# EAGLE board HV rev1 (EAGLE 8.4.1), part 1 of 2
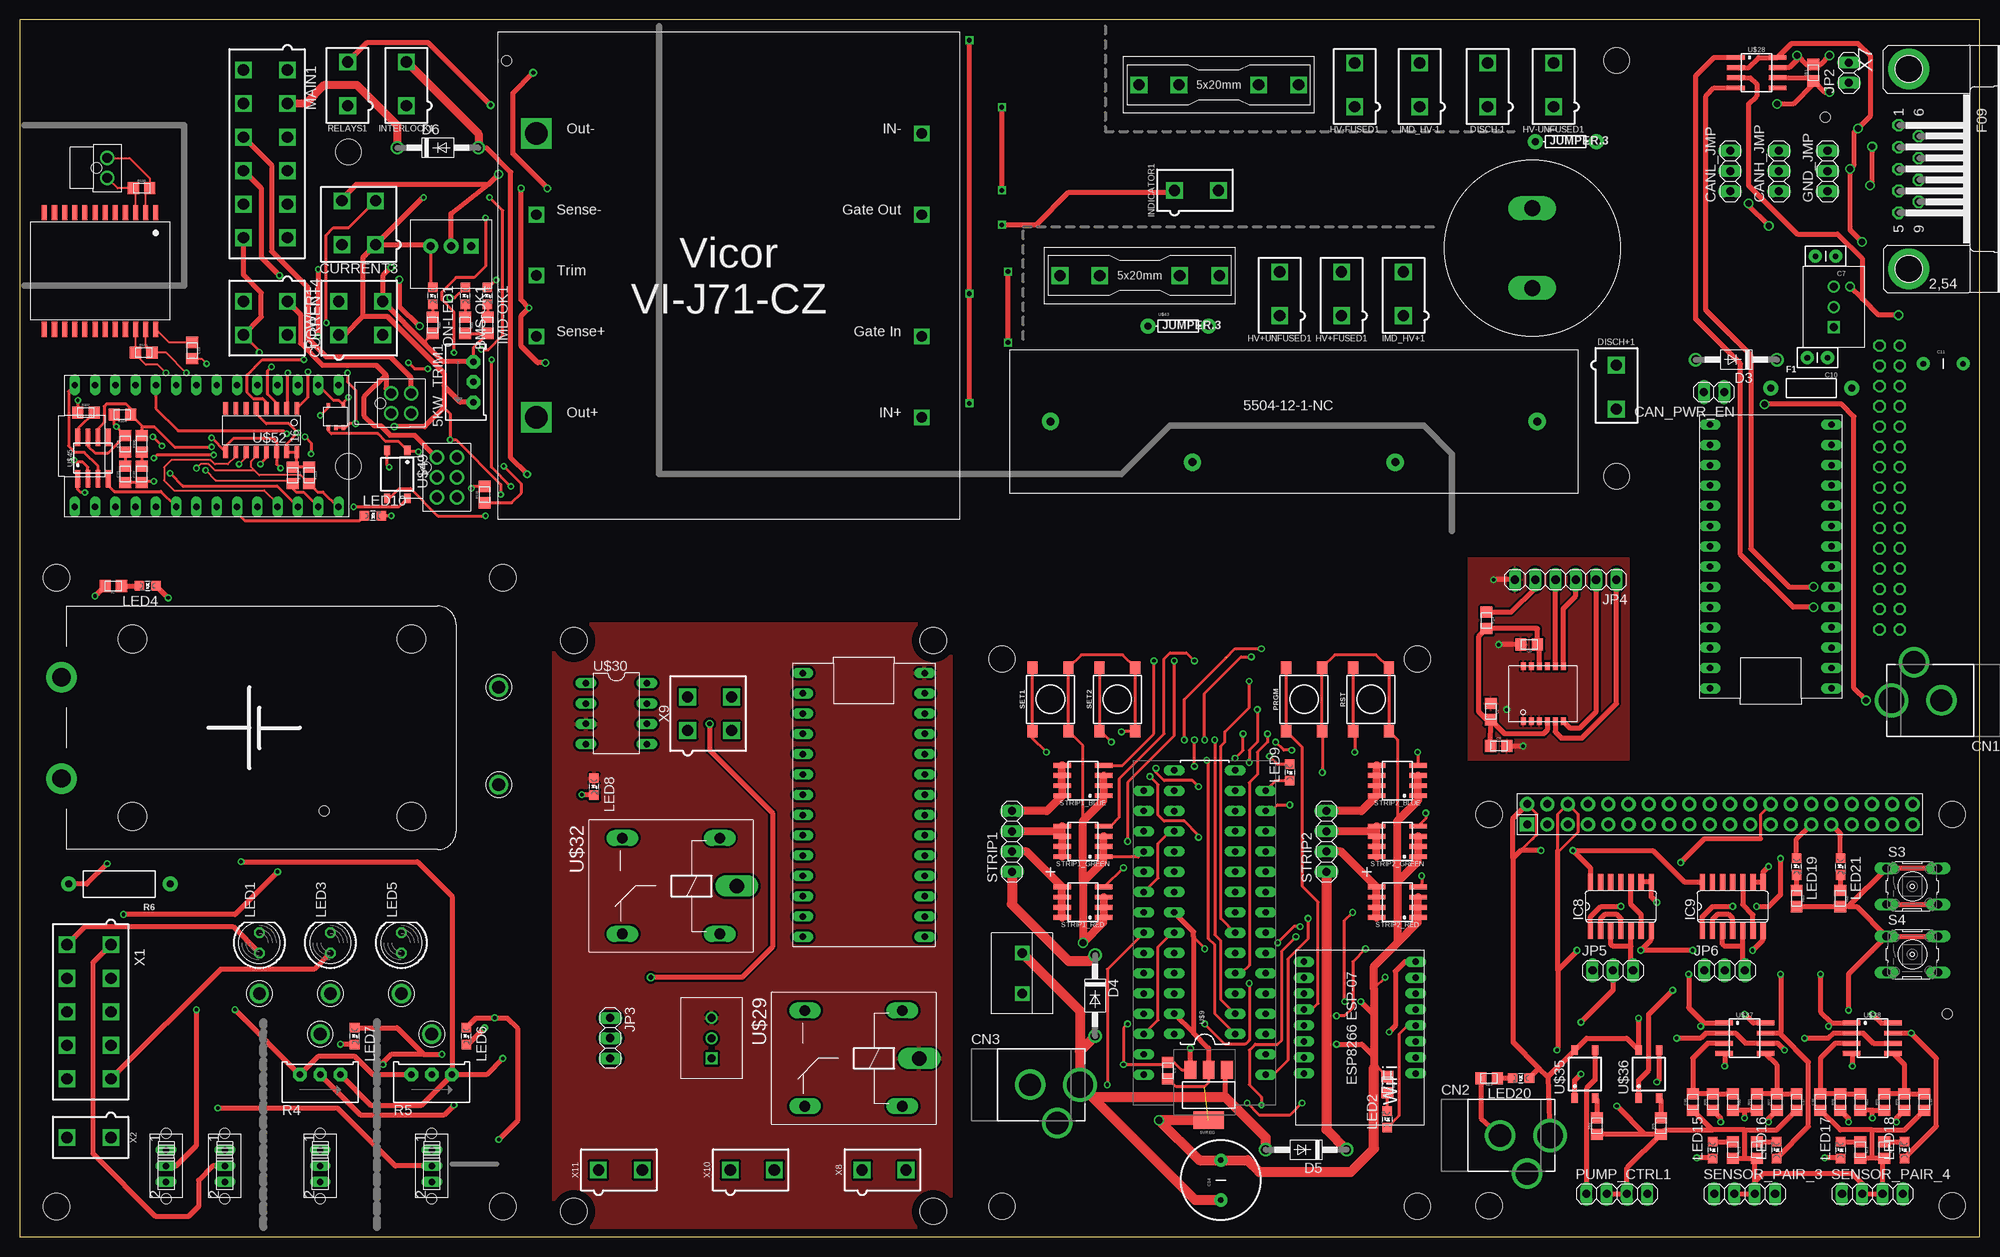
[diagram p0: board, top side]
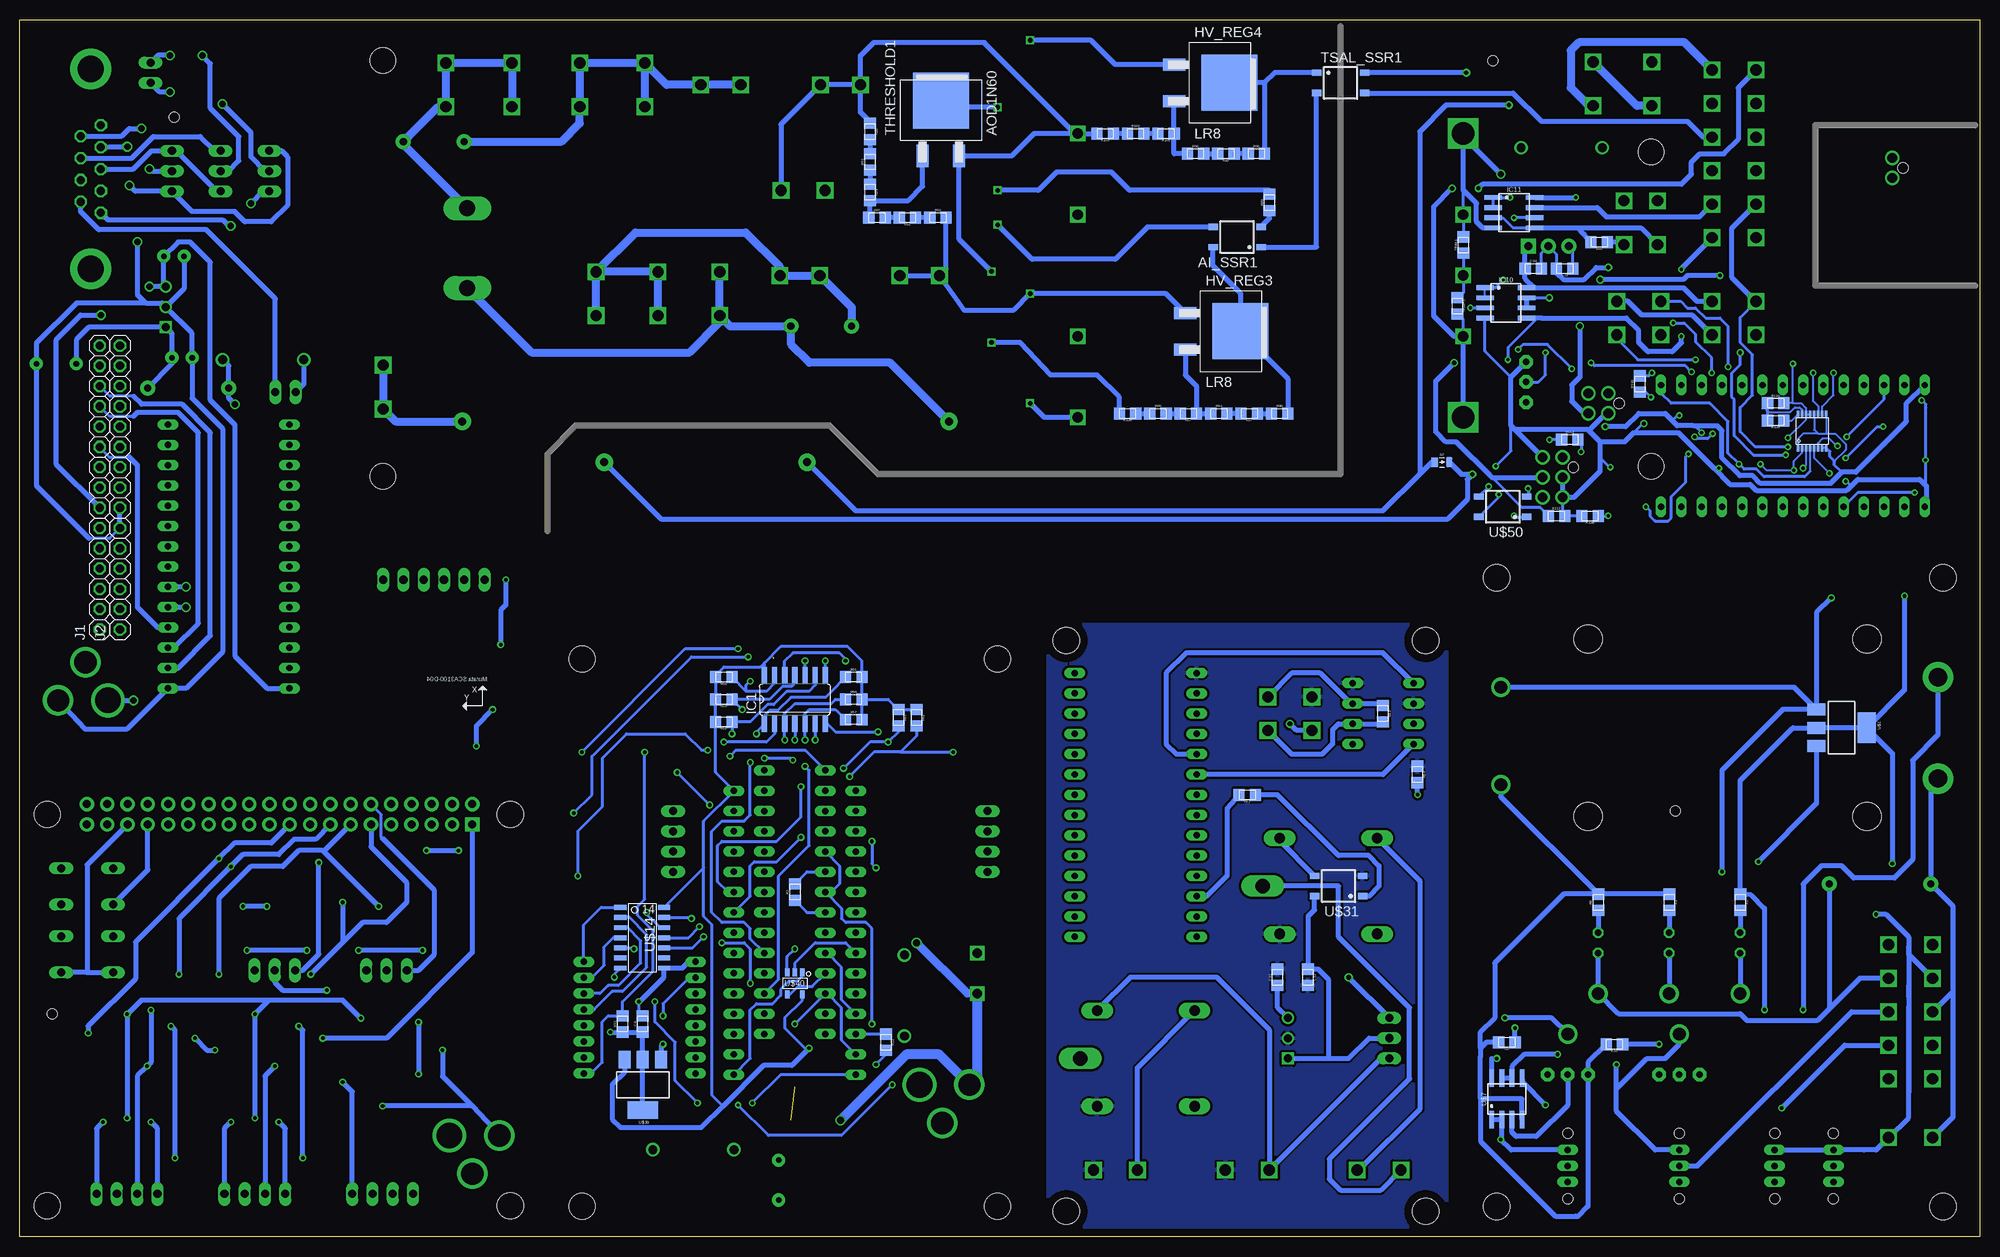
[diagram p1: board, bottom side, seen from below]

Size 245.36 x 152.4 mm. Coordinates in mm from the lower left corner, seen from the top.
Outline: 0,0 245.36,0 245.36,152.4 0,152.4 0,0
Copper layers (1*16): Top 0.035mm / dielectric 1.5mm / Bottom 0.035mm
Design rules "default *": minimum track width 6mil, minimum drill 0.35mm, track to track 12mil, track to pad 12mil, pad to pad 6mil, via to via 6mil, smd to smd 6mil, copper to edge 40mil, drill to drill 6mil, minimum pad ring 10mil, minimum via ring 8mil, stop-mask expansion 4mil, vias tented up to drill 0mil, thermal gap 10mil
Holes 3.3 mm at 114.35,74.69 69.35,74.69 114.35,3.19 69.35,3.19 183.95,52.89 241.95,52.89 183.95,3.89 241.95,3.89
Holes 3.33 mm at 4.57,3.81 60.45,3.81 60.45,82.55 4.57,82.55
Holes 3.28 mm at 122.94,72.39 175.01,3.81 175.01,72.39 122.94,3.81
Holes 3.2 mm at 41.15,135.89 41.15,96.52 199.9,95.25 199.9,147.32
Holes 1.27 mm at 60.96,147.32 226.06,140.21 241.3,27.94 38.1,53.34

## Footprints (pad centres in the part's own frame; a part is rotated, then mirrored left to right if it is on the bottom)
TRIMPOT_3296 = drill 0.813 pad 1.676 octagon: 1 2.54,1.27; 2 0,1.27; 3 -2.54,1.27
SOT223 = smd 1.5 x 2.235: 1 -2.3,-3.15; 2 0,-3.15; 3 2.3,-3.15 | smd 3.8 x 2.2: 4 0,3.15
1291-79 = drill 2.286 pad 3.81: + 43.815,-6.35; - 43.815,6.35 | hole 3.556: 0,11.113; 0,-11.113; 34.925,-11.113; 34.925,11.113
SOP04 = smd 0.8 x 1.2: 1 -1.27,-3; 2 1.27,-3; 3 1.27,3; 4 -1.27,3
LED-805 = smd 1.2 x 1.2: A 0,-1.05; C 0,1.05
0805 = smd 1.4 x 1.5: 1 -1.025,0; 2 1.025,0
CAP-PTH-SMALLEZ = drill 0.7 pad 1.651: 1 0,0; 2 2.54,0
CAP-PTH-5MM = drill 0.7 pad 1.651: 1 -2.5,0; 2 2.5,0
LLS2V221MELZ = drill 2 long: P$1 -5,0; P$2 5,0
1X02 = drill 1.016 long: 1 -1.27,0; 2 1.27,0
1X03 = drill 1.016 long: 1 -2.54,0; 2 0,0; 3 2.54,0
DCJACK_2MM_PTH = drill 2.8: GND 0,7.35; GNDBREAK 4.8,10.75 | drill 3.2: PWR 0,13.6
MINIFIT_5566-4 = drill 1.4 square: 1 2.1,-2.75; 2 -2.1,-2.75; 3 2.1,2.75; 4 -2.1,2.75
DO-41 = drill 1.118: A 5.08,0; C -5.08,0
0805_D = smd 0.8 x 1.2: A -0.9,0; C 0.9,0
MINIFIT_5566-2 = drill 1.4 square: 1 0,-2.75; 2 0,2.75
NANO-FIT_VERTICAL-4 = drill 1.2: P$1 -1.25,0; P$2 1.25,0; P$3 -1.25,2.5; P$4 1.25,2.5 | hole 1.3: 0,-1.34
AXIAL-0.4 = drill 0.9 pad 1.88: P$1 -5.08,0; P$2 5.08,0
0751.0110 = drill 1.4 square: L1 -10,0; L2 -5,0; R1 5,0; R2 10,0
TO-252 = smd 1.499 x 2.794: 1 -2.286,0; 3 2.286,0 | smd 7.01 x 7.01: 2(TAB) 0,6.909
SO14 = smd 0.66 x 2.032: 1 -3.81,-3.073; 2 -2.54,-3.073; 3 -1.27,-3.073; 4 0,-3.073; 5 1.27,-3.073; 6 2.54,-3.073; 7 3.81,-3.073; 8 3.81,3.073; 9 2.54,3.073; 10 1.27,3.073; 11 0,3.073; 12 -1.27,3.073; 13 -2.54,3.073; 14 -3.81,3.073
TO-220-SPACED = drill 1 square: 1 -2.54,0 | drill 1: 2 0,0; 3 2.54,0
OKI-78SR = drill 1 pad 1.88 square: 1 -2.54,0 | drill 1 pad 1.88: 2 0,0; 3 2.54,0
SOIC-08 = smd 0.6 x 2.2: 1 -1.905,-2.6; 2 -0.635,-2.6; 3 0.635,-2.6; 4 1.905,-2.6; 5 1.905,2.6; 6 0.635,2.6; 7 -0.635,2.6; 8 -1.905,2.6
NANO-FIT_VERTICAL-6 = drill 1.2: P$1 -2.5,0; P$2 0,0; P$3 2.5,0; P$4 -2.5,2.5; P$5 0,2.5; P$6 2.5,2.5 | hole 1.3: -1.25,-1.34
NANO-FIT_VERTICAL-2 = drill 1.2: P$1 -1.25,0; P$2 1.25,0 | hole 1.3: 0,-1.34
1X15 = drill 1.016 octagon: 1 0,0; 2 2.54,0; 3 5.08,0; 4 7.62,0; 5 10.16,0; 6 12.7,0; 7 15.24,0; 8 17.78,0; 9 20.32,0; 10 22.86,0; 11 25.4,0; 12 27.94,0; 13 30.48,0; 14 33.02,0; 15 35.56,0
1X06 = drill 1.016 long: 1 -6.35,0; 2 -3.81,0; 3 -1.27,0; 4 1.27,0; 5 3.81,0; 6 6.35,0
LED-5MM = drill 0.813 octagon: A -1.27,0; K 1.27,0
MINIFIT_5566-12 = drill 1.4 square: 1 10.5,-2.75; 2 6.3,-2.75; 3 2.1,-2.75; 4 -2.1,-2.75; 5 -6.3,-2.75; 6 -10.5,-2.75; 7 10.5,2.75; 8 6.3,2.75; 9 2.1,2.75; 10 -2.1,2.75; 11 -6.3,2.75; 12 -10.5,2.75
TACTILE_SWITCH_SMD_6.2MM_TALL = smd 1.55 x 1.3: A1 -3.975,-2.25; A2 3.975,-2.25; B1 -3.975,2.25; B2 3.975,2.25
1X04 = drill 1.016 long: 1 -3.81,0; 2 -1.27,0; 3 1.27,0; 4 3.81,0
AXIAL-0.5 = drill 0.9 pad 1.88: P$1 -6.35,0; P$2 6.35,0
B3F-10XX = drill 1.016 long: 1 -3.251,2.261; 2 3.251,2.261; 3 -3.251,-2.261; 4 3.251,-2.261
0S102011MS2QS1 = drill 0.8 long: P$1 -2,0; P$2 0,0; P$3 2,0 | hole 1.27: 4.102,0; -4.102,0
TEST_POINT = drill 1.6: P$1 0,0
DIL28-3 = drill 0.813 long: 1 -16.51,-3.81; 2 -13.97,-3.81; 3 -11.43,-3.81; 4 -8.89,-3.81; 5 -6.35,-3.81; 6 -3.81,-3.81; 7 -1.27,-3.81; 8 1.27,-3.81; 9 3.81,-3.81; 10 6.35,-3.81; 11 8.89,-3.81; 12 11.43,-3.81; 13 13.97,-3.81; 14 16.51,-3.81; 15 16.51,3.81; 16 13.97,3.81; 17 11.43,3.81; 18 8.89,3.81; 19 6.35,3.81; 20 3.81,3.81; 21 1.27,3.81; 22 -1.27,3.81; 23 -3.81,3.81; 24 -6.35,3.81; 25 -8.89,3.81; 26 -11.43,3.81; 27 -13.97,3.81; 28 -16.51,3.81
ARDUINO_NANO = drill 0.8 long: 3.3V 1.27,36.83; 5V 1.27,11.43; A0 1.27,31.75; A1 1.27,29.21; A2 1.27,26.67; A3 1.27,24.13; A4 1.27,21.59; A5 1.27,19.05; A6 1.27,16.51; A7 1.27,13.97; AREF 1.27,34.29; D0(RX) 16.51,6.35; D1(TX) 16.51,3.81; D2 16.51,13.97; D3 16.51,16.51; D4 16.51,19.05; D5 16.51,21.59; D6 16.51,24.13; D7 16.51,26.67; D8 16.51,29.21; D9 16.51,31.75; D10 16.51,34.29; D11 16.51,36.83; D12 16.51,39.37; D13 1.27,39.37; GND 1.27,6.35; GND1 16.51,11.43; RST 1.27,8.89; RST1 16.51,8.89; VIN 1.27,3.81
DG301-02P = drill 1.2 square: 1 2.54,3.81; 2 7.62,3.81
ESP8266_ESP-07 = drill 0.8 long: P$1 6.5,-15; P$2 8.5,-15; P$3 10.5,-15; P$4 12.5,-15; P$5 14.5,-15; P$6 16.5,-15; P$7 18.5,-15; P$8 20.5,-15; P$9 20.5,-1; P$10 18.5,-1; P$11 16.5,-1; P$12 14.5,-1; P$13 12.5,-1; P$14 10.5,-1; P$15 8.5,-1; P$16 6.5,-1
SOIC-14 = smd 0.61 x 1.524: 1 -4.445,-2.794; 2 -3.175,-2.794; 3 -1.905,-2.794; 4 -0.635,-2.794; 5 0.635,-2.794; 6 1.905,-2.794; 7 3.175,-2.794; 8 3.175,2.667; 9 1.905,2.667; 10 0.635,2.667; 11 -0.635,2.667; 12 -1.905,2.667; 13 -3.175,2.667; 14 -4.445,2.667
SCA3100-D04 = smd 0.98 x 0.61: AVDD 0.06,-4.8; AVSS 0.06,-3.8; CSB 0.06,-5.8; DVDD 6.94,-3.8; DVSS 6.94,-2.8; EGND 6.94,-1.8; MISO 0.06,-6.8; MOSI 6.94,-5.8; NC1 0.06,-1.8; NC2 0.06,-2.8; PWM 6.94,-4.8; SCK 6.94,-6.8
TEENSY_3.2_SIMPLE = drill 0.8 long: 3.3V 16.51,29.21; A0 16.51,3.81; A1 16.51,6.35; A2 16.51,8.89; A3 16.51,11.43; A4 16.51,13.97; A5 16.51,16.51; A6 16.51,19.05; A7 16.51,21.59; A8 16.51,24.13; A9 16.51,26.67; AGND 16.51,31.75; D0(RX1) 1.27,31.75; D1(TX1) 1.27,29.21; D2 1.27,26.67; D3(CANTX) 1.27,24.13; D4(CANRX) 1.27,21.59; D5 1.27,19.05; D6 1.27,16.51; D7(RX3) 1.27,13.97; D8(TX3) 1.27,11.43; D9(RX2) 1.27,8.89; D10(TX2) 1.27,6.35; D11 1.27,3.81; D12 1.27,1.27; D13 16.51,1.27; GND 1.27,34.29; VIN 16.51,34.29
ZF112 = drill 1.321 long: 1 4.064,14.884; 2 4.064,2.896; O 16.256,14.884; S 16.256,2.896 | drill 1.803 long: P 1.956,8.89
DIL08 = drill 0.813 long: 1 -3.81,-3.81; 2 -1.27,-3.81; 3 1.27,-3.81; 4 3.81,-3.81; 5 3.81,3.81; 6 1.27,3.81; 7 -1.27,3.81; 8 -3.81,3.81
RASPBERRY_PI_HEADER = drill 1 pad 1.778 square: 1 1.268,1.264 | drill 1 pad 1.778: 2 1.268,3.804; 3 3.808,1.264; 4 3.808,3.804; 5 6.348,1.264; 6 6.348,3.804; 7 8.888,1.264; 8 8.888,3.804; 9 11.428,1.264; 10 11.428,3.804; 11 13.968,1.264; 12 13.968,3.804; 13 16.508,1.264; 14 16.508,3.804; 15 19.048,1.264; 16 19.048,3.804; 17 21.588,1.264; 18 21.588,3.804; 19 24.128,1.264; 20 24.128,3.804; 21 26.668,1.264; 22 26.668,3.804; 23 29.208,1.264; 24 29.208,3.804; 25 31.748,1.264; 26 31.748,3.804; 27 34.288,1.264; 28 34.288,3.804; 29 36.828,1.264; 30 36.828,3.804; 31 39.368,1.264; 32 39.368,3.804; 33 41.908,1.264; 34 41.908,3.804; 35 44.448,1.264; 36 44.448,3.804; 37 46.988,1.264; 38 46.988,3.804; 39 49.528,1.264; 40 49.528,3.804
SOT-23-5 = smd 1 x 0.55: 1 -1.35,0.95; 2 -1.35,0; 3 -1.35,-0.95; 4 1.35,-0.95; 5 1.35,0.95
5504-12-1-NC = drill 1.016 pad 2.184: COIL+ 48.26,-14.097; COIL- 22.86,-14.097; CONTACT1 5.08,-9.017; CONTACT2 66.04,-9.017
HV_DCDC_VI-J71-CZ = drill 1.3 square: 1VIN+ 5.08,-12.7; 2GATEIN 5.08,-22.86; 3GATEOUT 5.08,-38.1; 4VIN- 5.08,-48.26; 6SENSE+ 53.34,-22.86; 7TRIM 53.34,-30.48; 8SENSE- 53.34,-38.1 | drill 2.8 square: 5VOUT+ 53.34,-12.7; 9VOUT- 53.34,-48.26
AXIAL-0.3 = drill 0.9 pad 1.88: P$1 -3.81,0; P$2 3.81,0
MSOP-16 = smd 0.305 x 0.889: 1 -0.1,-0.5; 2 0.4,-0.5; 3 0.9,-0.5; 4 1.4,-0.5; 5 1.9,-0.5; 6 2.4,-0.5; 7 2.9,-0.5; 8 3.4,-0.5; 9 3.4,3.7; 10 2.9,3.7; 11 2.4,3.7; 12 1.9,3.7; 13 1.4,3.7; 14 0.9,3.7; 15 0.4,3.7; 16 -0.1,3.7
SOT23-5 = smd 0.61 x 0.406: EN -2.794,0; GND -2.794,0.94; VCC 0,1.905; WDI 0,0; WDO -2.794,1.905
SM51589PEL = smd 0.635 x 1.905: 1 0,0; 2 1.27,0; 3 2.54,0; 4 3.81,0; 5 5.08,0; 6 6.35,0; 7 7.62,0; 8 8.89,0; 9 10.16,0; 10 11.43,0; 11 12.7,0; 12 13.97,0; 13 13.97,14.605; 14 12.7,14.605; 15 11.43,14.605; 16 10.16,14.605; 17 8.89,14.605; 18 7.62,14.605; 19 6.35,14.605; 20 5.08,14.605; 21 3.81,14.605; 22 2.54,14.605; 23 1.27,14.605; 24 0,14.605
SOIC-16 = smd 0.61 x 1.524: 1 -4.445,-2.794; 2 -3.175,-2.794; 3 -1.905,-2.794; 4 -0.635,-2.794; 5 0.635,-2.794; 6 1.905,-2.794; 7 3.175,-2.794; 8 4.445,-2.794; 9 4.445,2.667; 10 3.175,2.667; 11 1.905,2.667; 12 0.635,2.667; 13 -0.635,2.667; 14 -1.905,2.667; 15 -3.175,2.667; 16 -4.445,2.667
MINIFIT_5566-10 = drill 1.4 square: 1 8.4,-2.75; 2 4.2,-2.75; 3 0,-2.75; 4 -4.2,-2.75; 5 -8.4,-2.75; 6 8.4,2.75; 7 4.2,2.75; 8 0,2.75; 9 -4.2,2.75; 10 -8.4,2.75
F09HP = drill 1.016 octagon: 1 -5.486,-1.27; 2 -2.743,-1.27; 3 0,-1.27; 4 2.743,-1.27; 5 5.486,-1.27; 6 -4.115,1.27; 7 -1.372,1.27; 8 1.372,1.27; 9 4.115,1.27 | drill 3.302 pad 5.08: G1 -12.522,0; G2 12.522,0

## Placement (x,y rotation side)
5KW_TRIM1  [TRIMPOT_3296]  55.5,107.06 270 top
5VREG  [SOT223]  148.84,17.78 180 top
9V  1291-79  [1291-79]  49.02,63.75 180 top
AI_SSR1  CPC1002N  [SOP04]  92.96,125.22 90 bottom
BMS-OK1  GREEN  [LED-805]  55.75,117.86 180 top
C2  100 nF  [0805]  184.15,65.79 270 top
C3  .1µF  [0805]  143.76,20.83 270 top
C4  1µF  [0805]  167.39,26.67 90 bottom
C7  .1µF  [CAP-PTH-SMALLEZ]  227.36,122.81 180 top
C8  100 nF  [0805]  188.98,74.17 180 top
C9  10 uF  [0805]  185.17,61.47 0 top
C10  .33µF  [CAP-PTH-SMALLEZ]  226.34,110.11 180 top
C11  [CAP-PTH-5MM]  240.82,109.35 0 top
C12  0.33 uF  [0805]  84.07,32.51 270 bottom
C13  0.1 uF  [0805]  87.88,32.51 90 bottom
C14  [CAP-PTH-5MM]  150.37,7.11 90 top
C15  10uF  [0805]  51.94,121.28 180 bottom
C16  1µ  [0805]  209.45,16.89 90 top
C17  1µ  [0805]  222.45,16.89 270 top
C18  1µ  [0805]  225.45,16.89 90 top
C19  1µ  [0805]  238.45,16.89 270 top
C20  220uF  [LLS2V221MELZ]  189.36,123.83 90 top
C21  560pF  [0805]  13.21,95.5 90 top
C22  560pF  [0805]  15.24,95.5 90 top
C23  27pF  [0805]  21.59,111 270 top
C24  10uF  [0805]  55.88,121.28 0 bottom
CAN_PWR_EN  [1X02]  212.12,105.79 180 top
CANH_JMP  [1X03]  220.24,133.48 90 top
CANL_JMP  [1X03]  214.15,133.48 90 top
CN1  [DCJACK_2MM_PTH]  247.93,67.18 90 top
CN2  [DCJACK_2MM_PTH]  177.98,12.71 270 top
CN3  [DCJACK_2MM_PTH]  119.13,19.05 270 top
CURRENT3  CONNECTOR-4  [MINIFIT_5566-4]  42.42,127 0 top
CURRENT4  CONNECTOR-4  [MINIFIT_5566-4]  42.67,115.06 270 top
D3  DIODEDO-41  [DO-41]  214.91,109.86 180 top
D4  DIODEDO-41  [DO-41]  134.62,30.23 270 top
D5  DIODEDO-41  [DO-41]  161.04,10.92 180 top
D6  DIODE  [DO-41]  52.32,136.4 0 top
D7  DIODE0805  [0805_D]  67.31,97.03 0 bottom
DISCH+1  DISCHARGE+  [MINIFIT_5566-2]  199.9,106.43 180 top
DISCH-1  DISCHARGE -  [MINIFIT_5566-2]  183.77,144.27 0 top
EM1  CONNECTOR-4  [NANO-FIT_VERTICAL-4]  46.48,104.39 270 top
F1  [AXIAL-0.4]  224.31,106.3 0 top
FUSE2  1A  [0751.0110]  140.21,120.4 180 top
FUSE3  1A  [0751.0110]  150.11,144.27 180 top
GND_JMP  [1X03]  226.34,133.48 90 top
HV+FUSED1  FUSED+  [MINIFIT_5566-2]  165.48,118.11 0 top
HV+UNFUSED1  FSAE  [MINIFIT_5566-2]  157.73,118.11 0 top
HV-FUSED1  FUSED-  [MINIFIT_5566-2]  167.13,144.27 0 top
HV-UNFUSED1  FSAE  [MINIFIT_5566-2]  192.02,144.27 0 top
HV_REG3  LR8  [TO-252]  99.44,113.41 270 bottom
HV_REG4  LR8  [TO-252]  100.84,144.53 270 bottom
IC1  74HC04D  [SO14]  148.34,67.31 0 bottom
IC5  [TO-220-SPACED]  227.1,116.46 90 top
IC6  [TO-220-SPACED]  86.61,24.89 90 top
IC7  OKI-78SR  [OKI-78SR]  53.98,124.08 180 top
IC8  4001D  [SO14]  200.45,41.39 0 top
IC9  4001D  [SO14]  214.45,41.39 0 top
IC10  NE5532SOIC  [SOIC-08]  59.31,116.97 270 bottom
IC11  NE5532SOIC  [SOIC-08]  58.29,128.27 270 bottom
IMD1  CONNECTOR-6  [NANO-FIT_VERTICAL-6]  52.2,95.12 270 top
IMD-OK1  YELLOW  [LED-805]  58.55,117.86 180 top
IMD_HV+1  IMD+  [MINIFIT_5566-2]  173.23,118.11 0 top
IMD_HV-1  IMD-  [MINIFIT_5566-2]  175.26,144.27 0 top
INDICATOR1  INDICATOR  [MINIFIT_5566-2]  147.32,131.06 270 top
INTERLOCK1  [MINIFIT_5566-2]  48.39,144.4 0 top
ISOSPI1  CONNECTOR-2  [NANO-FIT_VERTICAL-2]  10.92,133.86 270 top
J1  [1X15]  235.39,76.07 90 bottom
J2  [1X15]  232.85,76.07 90 bottom
JP2  M02  [1X02]  229.01,145.8 90 top
JP3  [1X03]  73.91,24.89 270 top
JP4  [1X06]  193.55,82.3 180 top
JP5  [1X03]  199.45,33.39 0 top
JP6  [1X03]  213.45,33.39 0 top
LED1  RED  [LED-5MM]  29.97,36.83 90 top
LED2  Red  [LED-805]  171.2,14.73 0 top
LED3  GREEN  [LED-5MM]  38.86,36.83 90 top
LED4  PURPLE  [LED-805]  16,81.53 90 top
LED5  BLUE  [LED-5MM]  47.75,36.83 90 top
LED6  RED  [LED-805]  55.88,25.15 180 top
LED7  YELLOW  [LED-805]  41.91,25.15 180 top
LED8  PURPLE  [LED-805]  71.88,56.39 180 top
LED9  [LED-805]  159,58.17 0 top
LED10  BLUE  [LED-805]  44.2,90.3 270 top
LED15  RED  [LED-805]  211.95,10.89 0 top
LED16  BLUE  [LED-805]  219.95,10.89 0 top
LED17  GREEN  [LED-805]  227.95,10.89 0 top
LED18  ORANGE  [LED-805]  235.95,10.89 0 top
LED19  GREEN  [LED-805]  222.45,46.39 180 top
LED20  PURPLE  [LED-805]  187.95,19.89 90 top
LED21  RED  [LED-805]  227.95,46.39 180 top
MAIN1  CONNECTOR-12  [MINIFIT_5566-12]  30.73,135.64 90 top
ON-LED1  PURPLE  [LED-805]  51.69,117.86 180 top
POWER1  CONNECTOR-4  [MINIFIT_5566-4]  30.73,115.06 90 top
PRGM  [TACTILE_SWITCH_SMD_6.2MM_TALL]  160.78,67.31 90 top
PUMP_CTRL1  [1X04]  199.95,5.39 0 top
R1  270  [0805]  29.97,41.91 270 bottom
R2  2.2k  [0805]  148.34,43.18 90 bottom
R3  200  [0805]  38.86,41.91 270 bottom
R4  [TRIMPOT_3296]  37.59,19.05 0 top
R5  [TRIMPOT_3296]  51.56,19.05 0 top
R6  [AXIAL-0.5]  12.45,44.2 180 top
R7  200  [0805]  11.68,81.53 180 top
R8  680  [0805]  47.75,41.91 90 bottom
R9  270  [0805]  59.18,24.38 180 bottom
R10  270  [0805]  45.72,24.13 180 bottom
R11  10k  [0805]  136.91,24.38 270 bottom
R12  10k  [0805]  169.93,26.67 90 bottom
R14  10 ohm  [0805]  183.64,77.22 270 top
R51  120  [0805]  224.56,145.8 90 top
R52  330  [0805]  91.69,55.37 180 bottom
R53  120  [0805]  74.68,65.53 270 bottom
R54  200  [0805]  70.36,57.91 270 bottom
R55  10k  [0805]  140.97,70.1 0 bottom
R56  10k  [0805]  140.97,67.31 0 bottom
R57  10k  [0805]  140.97,64.77 0 bottom
R58  10k  [0805]  157.23,64.52 180 bottom
R59  10k  [0805]  157.23,67.31 180 bottom
R60  10k  [0805]  157.23,70.1 180 bottom
R61  100  [0805]  171.2,19.05 270 top
R62  10k  [0805]  133.1,65.02 270 bottom
R63  10k  [0805]  135.38,65.02 270 bottom
R64  2k  [0805]  95.25,103.12 0 bottom
R65  820  [0805]  58.55,114.17 90 top
R66  820  [0805]  55.75,114.17 270 top
R67  20k  [0805]  99.06,103.12 180 bottom
R68  10k  [0805]  47.62,124.59 180 bottom
R69  270  [0805]  197.45,13.89 90 top
R70  2M  [0805]  233.45,16.89 90 top
R71  100  [0805]  214.45,10.89 270 top
R72  100  [0805]  217.45,10.89 270 top
R73  100  [0805]  230.45,10.89 270 top
R74  100  [0805]  233.45,10.89 270 top
R75  270  [0805]  205.45,13.89 90 top
R76  330  [0805]  211.95,16.89 90 top
R77  330  [0805]  219.95,16.89 90 top
R78  330  [0805]  227.95,16.89 90 top
R79  330  [0805]  235.95,16.89 90 top
R80  2M  [0805]  214.45,16.89 270 top
R81  2M  [0805]  217.45,16.89 90 top
R82  2M  [0805]  230.45,16.89 270 top
R83  150  [0805]  222.45,42.39 270 top
R84  150  [0805]  183.95,19.89 180 top
R85  150  [0805]  227.95,42.39 270 top
R86  270  [0805]  51.69,114.17 270 top
R87  510k  [0805]  138.05,127.64 0 bottom
R88  43k  [0805]  138.94,138.43 270 bottom
R89  1k  [0805]  88.9,129.54 90 bottom
R90  2k  [0805]  90.55,135.64 0 bottom
R91  510k  [0805]  134.24,127.64 180 bottom
R92  510k  [0805]  130.43,127.64 0 bottom
R93  43k  [0805]  138.94,134.62 90 bottom
R94  43k  [0805]  138.94,130.81 270 bottom
R95  2k  [0805]  94.36,135.64 180 bottom
R96  2k  [0805]  98.17,135.64 0 bottom
R97  2k  [0805]  91.44,103.12 180 bottom
R98  2k  [0805]  87.63,103.12 0 bottom
R99  20k  [0805]  102.87,103.12 0 bottom
R100  20k  [0805]  106.68,103.12 180 bottom
R101  8.2k  [0805]  101.85,138.18 180 bottom
R102  8.2k  [0805]  105.66,138.18 0 bottom
R103  8.2k  [0805]  109.47,138.18 180 bottom
R104  120  [0805]  12.83,103 180 top
R105  100  [0805]  13.21,99.31 90 top
R106  100  [0805]  15.24,99.31 90 top
R107  1k  [0805]  8.26,103.25 0 top
R108  43  [0805]  48.77,90.3 180 bottom
R109  1k  [0805]  25.53,102.23 180 bottom
R110  1k  [0805]  25.53,104.39 0 bottom
R111  120  [0805]  15.49,110.74 0 top
R112  2k  [0805]  34.16,95.38 270 top
R113  2k  [0805]  36.2,95.38 270 top
R114  430  [0805]  51.31,99.82 0 bottom
R115  200  [0805]  58.17,92.96 90 top
R116  100  [0805]  15.24,131.32 0 top
R117  2k  [0805]  52.96,90.3 0 bottom
R118  10k  [0805]  42.55,106.81 90 bottom
RELAYS1  [MINIFIT_5566-2]  41.02,144.4 0 top
RST  [TACTILE_SWITCH_SMD_6.2MM_TALL]  169.16,67.31 90 top
S3  [B3F-10XX]  236.95,43.89 0 top
S4  [B3F-10XX]  236.95,35.39 0 top
SENSOR_PAIR_3  [1X04]  215.95,5.39 0 top
SENSOR_PAIR_4  [1X04]  231.95,5.39 0 top
SET1  [TACTILE_SWITCH_SMD_6.2MM_TALL]  129.03,67.31 90 top
SET2  [TACTILE_SWITCH_SMD_6.2MM_TALL]  137.41,67.31 90 top
STRIP1  [1X04]  124.21,49.53 90 top
STRIP1_BLUE  MDS1656  [SOIC-08]  133.1,57.15 90 top
STRIP1_GREEN  MDS1656  [SOIC-08]  133.1,49.53 90 top
STRIP1_RED  MDS1656  [SOIC-08]  133.1,41.91 90 top
STRIP2  [1X04]  163.58,49.53 90 top
STRIP2_BLUE  MDS1656  [SOIC-08]  172.47,57.15 90 top
STRIP2_GREEN  MDS1656  [SOIC-08]  172.47,49.53 90 top
STRIP2_RED  MDS1656  [SOIC-08]  172.47,41.91 90 top
SW_INT_BR  0S102011MS2QS1  [0S102011MS2QS1]  51.56,8.89 270 top
SW_INT_CUR  0S102011MS2QS1  [0S102011MS2QS1]  37.59,8.89 270 top
SW_POWER  0S102011MS2QS1  [0S102011MS2QS1]  18.29,8.89 270 top
SW_POWER1  0S102011MS2QS1  [0S102011MS2QS1]  25.65,8.89 270 top
THRESHOLD1  AOD1N60  [TO-252]  130.05,135.38 0 bottom
TRIM+1  [0805]  65.41,116.59 270 bottom
TRIM-1  [0805]  64.64,124.21 90 bottom
TSAL_SSR1  CPC1002N  [SOP04]  80.01,144.53 270 bottom
U$1  [SOT223]  17.27,63.75 270 bottom
U$2  TEST_POINT  [TEST_POINT]  37.59,25.4 0 top
U$3  TEST_POINT  [TEST_POINT]  51.56,25.4 0 top
U$4  TEST_POINT  [TEST_POINT]  47.75,30.48 90 top
U$5  TEST_POINT  [TEST_POINT]  59.94,68.83 0 top
U$6  TEST_POINT  [TEST_POINT]  59.94,56.64 0 top
U$7  MCP6002SOIC  [SOIC-08]  59.18,17.27 0 bottom
U$8  TEST_POINT  [TEST_POINT]  38.86,30.48 270 top
U$9  TLC5940  [DIL28-3]  148.34,41.91 90 top
U$10  TEST_POINT  [TEST_POINT]  29.97,30.48 270 top
U$11  ARDUINO_NANO  [ARDUINO_NANO]  157.23,59.69 180 top
U$12  TERMINAL_BLOCK_DG301-02P  [DG301-02P]  121.67,38.1 270 top
U$13  ESP8266_ESP-07  [ESP8266_ESP-07]  159.77,13.97 90 top
U$14  [SOIC-14]  167.39,36.83 270 bottom
U$16  SCA3100-D04  [SCA3100-D04]  186.44,64.52 90 top
U$27  TEENSY_3.2_SIMPLE  [TEENSY_3.2_SIMPLE]  228.12,103 180 top
U$28  MCP2551  [SOIC-08]  217.45,145.8 270 top
U$29  G5LE  [ZF112]  114.55,31.24 180 top
U$30  MCP2551DIL  [DIL08]  74.68,65.53 270 top
U$31  CPC1002N  [SOP04]  80.26,43.94 90 bottom
U$32  G5LE  [ZF112]  91.69,52.83 180 top
U$33  TEENSY_3.2_SIMPLE  [TEENSY_3.2_SIMPLE]  96.77,36.32 0 top
U$34  RASPBERRY_PI_HEADER  [RASPBERRY_PI_HEADER]  187.45,50.39 0 top
U$35  CPC1002N  [SOP04]  195.95,20.39 0 top
U$36  CPC1002N  [SOP04]  203.95,20.39 0 top
U$37  MCP6002SOIC  [SOIC-08]  215.95,24.89 270 top
U$38  MCP6002SOIC  [SOIC-08]  231.95,24.89 270 top
U$39  TLV1117LV33  [SOT223]  167.39,19.05 180 bottom
U$40  SN74LVC1G08  [SOT-23-5]  148.34,31.75 270 bottom
U$41  5504-12-1-NC  [5504-12-1-NC]  123.95,111.12 0 top
U$42  HV_DCDC_VI-J71-CZ  [HV_DCDC_VI-J71-CZ]  117.98,89.92 180 top
U$43  JUMPER.3  [AXIAL-0.3]  145.03,114.05 0 top
U$44  JUMPER.3  [AXIAL-0.3]  193.55,137.16 0 top
U$45  MCP2551  [SOIC-08]  9.14,97.54 0 top
U$46  LTC6820  [MSOP-16]  22.61,99.31 0 bottom
U$47  TEENSY_3.2_SIMPLE  [TEENSY_3.2_SIMPLE]  41.15,90.17 90 top
U$48  STWD100  [SOT23-5]  40.51,104.14 90 top
U$49  [SOP04]  47.24,95.5 180 top
U$50  [SOP04]  59.69,91.44 90 bottom
U$51  SM51589PEL  [SM51589PEL]  17.02,128.27 180 top
U$52  MCP3208SOIC  [SOIC-16]  30.23,100.97 180 top
X1  CONNECTOR-10  [MINIFIT_5566-10]  8.64,28.19 90 top
X2  CONNECTOR-2  [MINIFIT_5566-2]  8.64,12.45 90 top
X7  [F09HP]  236.5,133.73 270 top
X8  CONNECTOR-2  [MINIFIT_5566-2]  108.2,8.38 270 top
X9  CONNECTOR-4  [MINIFIT_5566-4]  86.36,65.53 270 top
X10  CONNECTOR-2  [MINIFIT_5566-2]  91.69,8.38 270 top
X11  CONNECTOR-2  [MINIFIT_5566-2]  75.18,8.38 270 top

## Library data of the parts
5KW_TRIM1 5VREG 9V AI_SSR1 BMS-OK1 C2-C4 C7-C24 CAN_PWR_EN CANH_JMP CANL_JMP CN1-CN3 D3-D7 EM1 F1 FUSE2 FUSE3 GND_JMP HV_REG3 HV_REG4 IC5-IC7 IC10 IC11 IMD1 IMD-OK1 ISOSPI1 J1 J2 JP2-JP6 LED1-LED10 LED15-LED21 ON-LED1 PRGM PUMP_CTRL1 R1-R12 R14 R51-R118 RST SENSOR_PAIR_3 SENSOR_PAIR_4 SET1 SET2 STRIP1 STRIP1_BLUE STRIP1_GREEN STRIP1_RED STRIP2 STRIP2_BLUE STRIP2_GREEN STRIP2_RED SW_INT_BR SW_INT_CUR SW_POWER SW_POWER1 THRESHOLD1 TRIM+1 TRIM-1 TSAL_SSR1 U$1-U$14 U$16 U$27-U$52 = HyTechDevices
CURRENT3 CURRENT4 MAIN1 POWER1 X1 X9 = HyTechDevices; OC_FARNELL: unknown; OC_NEWARK: unknown
DISCH+1 DISCH-1 HV+FUSED1 HV+UNFUSED1 HV-FUSED1 HV-UNFUSED1 IMD_HV+1 IMD_HV-1 INDICATOR1 INTERLOCK1 RELAYS1 X2 X8 X10 X11 = HyTechDevices; OC_FARNELL: 1822072; OC_NEWARK: unknown
IC1 = 74xx-eu; SPICEPREFIX: I
IC8 IC9 = 40xx
S3 S4 = HyTechDevices; MPN: B3F-1000; OC_FARNELL: 176432; OC_NEWARK: 36M3542
X7 = con-subd; OC_FARNELL: unknown; OC_NEWARK: unknown

## Nets
5KW_TRIG1: 5KW_TRIM1.2 IC11.6
!Q3: IC8.2 IC8.4
!Q4: IC9.2 IC9.4
+3V1: C4.1 R12.1 U$13.P$8 U$14.1 U$39.2 U$39.4
+3V2: U$34.1 U$37.2 U$37.6 U$38.2 U$38.6
+3V4: U$46.6 U$47.3.3V
+5V: R4.1 R5.1 U$1.3 U$7.8
+5V1: 5VREG.3 C3.1 IC1.14 LED9.A R11.2 R55.2 R56.2 R57.2 R58.2 R59.2 R60.2 R62.1 R63.1 U$9.19 U$9.21 U$11.VIN U$14.14 U$39.3 U$40.5
+5V3: C7.1 IC5.3 J1.7 U$27.VIN U$28.3
+5V4: C13.1 IC6.3 LED8.A U$29.P U$30.3 U$33.VIN
+5V5: CN2.PWR IC8.14 IC9.14 LED20.A R70.1 R80.2 R81.1 R82.2 U$34.2 U$35.4 U$36.4 U$37.8 U$38.8
+5V6: 5KW_TRIM1.1 C15.1 CURRENT3.1 CURRENT4.1 IC7.3 IC11.8 ON-LED1.A R68.1 R112.1 R113.1 R114.1 U$45.3 U$46.1 U$46.7 U$46.8 U$46.9 U$46.12 U$47.VIN U$48.VCC U$50.4 U$52.5 U$52.15 U$52.16
+12V: LED4.A SW_POWER1.P$1 SW_POWER.P$1 U$1.1 U$5.P$1 X1.7 X2.1
+12V1: 5VREG.1 C14.1 CN3.PWR D4.A D5.A U$12.1
+12V3: C10.1 C11.1 F1.P$2 IC5.1
+12V4: C12.1 IC6.1 JP3.2 U$31.4
+12V5: C24.1 EM1.P$1 IC7.1 IC10.8 IMD1.P$1 POWER1.1
BLANK: R11.1 U$9.23 U$11.D10
BMS_OK1: IC10.5 MAIN1.6 U$50.3
BMS_WATCH1: U$49.3 U$50.1
BSPD_CUR_FAULT1: IC11.7 MAIN1.5
BUT3: S3.3 S3.4 U$34.33
BUT4: S4.3 S4.4 U$34.35
CANH1: CANH_JMP.2 JP2.2 R51.2 U$28.7
CANH2: MAIN1.12 POWER1.4 R104.2 R105.2 U$45.7
CANL1: CANL_JMP.2 JP2.1 R51.1 U$28.6
CANL2: MAIN1.11 POWER1.3 R104.1 R106.2 U$45.6
CANRX: U$27.D4(CANRX) U$28.4
CANTX: U$27.D3(CANTX) U$28.1
CHARGE5: C16.2 R76.2 R80.1 U$37.3
CHARGE6: C17.1 R77.2 R81.2 U$37.5
CHARGE7: C18.2 R78.2 R82.1 U$38.3
CHARGE8: C19.1 R70.2 R79.2 U$38.5
CS_LTC1: U$46.5 U$47.D10(TX2)
CS_MCP1: U$47.D9(RX2) U$52.10
CSB1: JP4.1 U$16.CSB
CUR_SENSE_1_RAW1: CURRENT3.2 IC11.3 IC11.5 R68.2
CUR_SENSE_3: CURRENT4.2 U$52.3
CUR_SENSE_4: IC11.1 IC11.2 U$52.1
DISCHARGE_RELAY_GND1: D7.A RELAYS1.2 U$41.COIL-
EM_IO3: EM1.P$3 MAIN1.9
EM_IO4: EM1.P$4 MAIN1.10
GND: 9V.- R1.1 R3.1 R4.3 R5.3 R6.P$2 R7.2 R8.2 R9.2 R10.2 U$1.2 U$1.4 U$6.P$1 U$7.4 X1.8 X2.2
GND1: 5VREG.2 5VREG.4 C3.2 C4.2 C14.2 CN3.GND IC1.7 PRGM.A1 PRGM.A2 R2.1 R61.1 RST.A1 RST.A2 SET1.A1 SET1.A2 SET2.A1 SET2.A2 STRIP1_BLUE.1 STRIP1_BLUE.2 STRIP1_BLUE.3 STRIP1_GREEN.1 STRIP1_GREEN.2 STRIP1_GREEN.3 STRIP1_RED.1 STRIP1_RED.2 STRIP1_RED.3 STRIP2_BLUE.1 STRIP2_BLUE.2 STRIP2_BLUE.3 STRIP2_GREEN.1 STRIP2_GREEN.2 STRIP2_GREEN.3 STRIP2_RED.1 STRIP2_RED.2 STRIP2_RED.3 U$9.22 U$9.27 U$11.GND U$11.GND1 U$12.2 U$13.P$9 U$14.7 U$14.8 U$39.1 U$40.3
GND3: C7.2 C10.2 C11.2 CN1.GND GND_JMP.2 IC5.2 J2.6 J2.7 U$27.GND U$28.2 U$28.8 X7.6
GND4: C12.2 C13.2 IC6.2 R54.1 U$29.1 U$30.2 U$30.8 U$31.2 U$32.1 U$33.GND X8.2 X9.2 X10.2
GND5: C16.1 C17.2 C18.1 C19.2 CN2.GND IC8.7 IC9.7 PUMP_CTRL1.2 PUMP_CTRL1.3 R69.1 R71.2 R72.2 R73.2 R74.2 R75.1 R83.2 R84.2 R85.2 S3.1 S3.2 S4.1 S4.2 SENSOR_PAIR_3.2 SENSOR_PAIR_3.3 SENSOR_PAIR_4.2 SENSOR_PAIR_4.3 U$34.6 U$37.4 U$38.4
GND6: 5KW_TRIM1.3 C15.2 C21.1 C22.1 C23.2 C24.2 CURRENT3.4 CURRENT4.4 EM1.P$2 IC7.2 IC10.4 IC11.4 IMD1.P$2 IMD1.P$3 IMD1.P$4 POWER1.2 R65.1 R66.2 R86.2 R107.1 R108.2 R110.2 R115.1 R117.2 R118.2 TRIM-1.2 U$42.8SENSE- U$42.9VOUT- U$45.2 U$46.13 U$46.14 U$47.GND U$48.EN U$48.GND U$49.2 U$52.9 U$52.14
GND7: C2.1 C8.2 C9.2 JP4.6 U$16.AVSS U$16.DVSS U$16.EGND U$16.NC1 U$16.NC2
GNDBREAK: CN1.GNDBREAK
GNDBREAK1: CN2.GNDBREAK
GNDBREAK2: CN3.GNDBREAK
HV+FUSED1: FUSE2.L1 FUSE2.L2 HV+FUSED1.1 HV+FUSED1.2 IMD_HV+1.1 IMD_HV+1.2 U$43.P$1
HV+FUSED_1A1: FUSE2.R1 FUSE2.R2 HV_REG3.1 HV_REG4.1 R92.2 U$42.1VIN+
HV+UNFUSED_FSAE1: C20.P$1 HV+UNFUSED1.1 HV+UNFUSED1.2 U$41.CONTACT1 U$43.P$2
HV+UNFUSED_FSAE_DISCHARGE1: DISCH+1.1 DISCH+1.2 U$41.CONTACT2
HV-FUSED1: FUSE3.L1 FUSE3.L2 HV-FUSED1.1 HV-FUSED1.2 IMD_HV-1.1 IMD_HV-1.2 U$44.P$1
HV-FUSED_1A1: FUSE3.R1 FUSE3.R2 INDICATOR1.2 R88.1 R100.2 R103.2 THRESHOLD1.3 U$42.4VIN-
HV-UNFUSED_FSAE1: C20.P$2 DISCH-1.1 DISCH-1.2 HV-UNFUSED1.1 HV-UNFUSED1.2 U$44.P$2
ISOSPI-M1: ISOSPI1.P$2 R116.1 U$51.3
ISOSPI-P1: ISOSPI1.P$1 R116.2 U$51.2
LED3: LED21.A U$34.31
LED4: LED19.A U$34.29
MISO1: U$11.D12 U$14.12
MISO2: R113.2 U$46.3 U$47.D12 U$52.12
MISO3: JP4.2 U$16.MISO
MISO_33: U$13.P$6 U$14.3
MOSI1: U$9.26 U$11.D11 U$14.11
MOSI2: R112.2 U$46.2 U$47.D11 U$52.11
MOSI3: JP4.4 U$16.MOSI
MOSI_33: U$13.P$7 U$14.4
N$1: LED1.K R1.2
N$2: R2.2 U$9.20
N$3: LED3.K R3.2
N$4: R4.2 U$7.5
N$5: R5.2 U$7.3
N$6: 9V.+ SW_POWER.P$2
N$7: LED4.C R7.1
N$8: LED6.A SW_INT_BR.P$1 U$3.P$1 U$7.1 U$7.2
N$9: LED7.A SW_INT_CUR.P$1 U$2.P$1 U$7.6 U$7.7
N$10: LED6.C R9.1
N$11: LED5.K R8.1
N$12: LED7.C R10.1
N$13: SW_POWER1.P$2 X1.1
N$14: U$9.18 U$11.D3
N$15: STRIP2.2 STRIP2_RED.5 STRIP2_RED.6 STRIP2_RED.7 STRIP2_RED.8
N$16: STRIP1.2 STRIP1_RED.5 STRIP1_RED.6 STRIP1_RED.7 STRIP1_RED.8
N$17: STRIP1.3 STRIP1_GREEN.5 STRIP1_GREEN.6 STRIP1_GREEN.7 STRIP1_GREEN.8
N$18: STRIP1.4 STRIP1_BLUE.5 STRIP1_BLUE.6 STRIP1_BLUE.7 STRIP1_BLUE.8
N$19: STRIP2.3 STRIP2_GREEN.5 STRIP2_GREEN.6 STRIP2_GREEN.7 STRIP2_GREEN.8
N$20: STRIP2.4 STRIP2_BLUE.5 STRIP2_BLUE.6 STRIP2_BLUE.7 STRIP2_BLUE.8
N$21: R12.2 RST.B1 RST.B2 U$13.P$1
N$22: IC1.2 STRIP2_RED.4
N$23: IC1.4 STRIP2_GREEN.4
N$24: IC1.8 STRIP1_RED.4
N$25: IC1.10 STRIP1_GREEN.4
N$27: C2.2 C8.1 C9.1 R14.2 U$16.AVDD U$16.DVDD
N$68: CAN_PWR_EN.1 X7.9
N$69: CAN_PWR_EN.2 D3.A
N$70: R53.2 U$30.6 X9.3
N$71: U$30.4 U$33.D4(CANRX)
N$72: U$30.1 U$33.D3(CANTX)
N$73: R52.2 U$33.D10(TX2)
N$74: R52.1 U$31.1
N$75: U$31.3 U$32.2
N$76: U$32.P X11.1
N$77: U$32.S X11.2
N$78: JP3.3 U$29.2 X10.1
N$79: JP3.1 X9.1
N$80: R53.1 U$30.7 X9.4
N$81: U$29.S X8.1
N$82: LED8.C R54.2
N$83: IC1.12 STRIP1_BLUE.4
N$84: IC1.6 STRIP2_BLUE.4
N$85: R69.2 U$35.2
N$86: R75.2 U$36.2
N$87: PUMP_CTRL1.1 U$35.3
N$88: PUMP_CTRL1.4 U$36.3
N$89: R78.1 SENSOR_PAIR_4.1
N$90: R79.1 SENSOR_PAIR_4.4
N$91: R77.1 SENSOR_PAIR_3.4
N$92: R76.1 SENSOR_PAIR_3.1
N$93: LED15.C R71.1
N$94: LED16.C R72.1
N$95: LED17.C R73.1
N$96: LED18.C R74.1
N$97: LED19.C R83.1
N$98: LED20.C R84.1
N$99: LED21.C R85.1
N$100: IC1.1 R55.1 U$9.1
N$101: IC1.3 R56.1 U$9.2
N$102: IC1.5 R57.1 U$9.3
N$103: IC1.13 R60.1 U$9.6
N$104: IC1.11 R59.1 U$9.5
N$105: IC1.9 R58.1 U$9.4
N$106: PRGM.B1 PRGM.B2 U$13.P$12
N$107: LED2.A U$13.P$4
N$108: LED9.C U$9.15
N$109: LED2.C R61.2
N$110: D4.C STRIP1.1
N$111: D5.C STRIP2.1
N$112: AI_SSR1.4 HV_REG3.2(TAB) R98.2
N$113: HV_REG3.3 R64.1 R67.1
N$114: IC10.1 IC10.2 IMD-OK1.A
N$115: BMS-OK1.A IC10.6 IC10.7
N$116: BMS-OK1.C R66.1
N$117: IMD-OK1.C R65.2
N$118: ON-LED1.C R86.1
N$119: HV_REG4.2(TAB) R90.2 TSAL_SSR1.1
N$120: R91.1 R92.1
N$121: R87.2 R91.2
N$122: R93.1 R94.1
N$123: R88.2 R93.2
N$124: AI_SSR1.2 R89.1
N$125: AI_SSR1.1 TSAL_SSR1.2
N$126: AI_SSR1.3 INDICATOR1.1
N$127: HV_REG4.3 R96.1 R101.1
N$128: R101.2 R102.2
N$129: R102.1 R103.1
N$130: R87.1 R94.2 THRESHOLD1.1
N$131: R95.2 R96.2
N$132: R90.1 R95.1
N$133: R89.2 THRESHOLD1.2(TAB)
N$134: R64.2 R97.2
N$135: R97.1 R98.1
N$136: R67.2 R99.2
N$137: R99.1 R100.1
N$138: U$45.1 U$47.D3(CANTX)
N$139: R107.2 U$45.8
N$140: C21.2 R105.1
N$141: C22.2 R106.1
N$142: LED10.C R108.1
N$143: R109.1 U$46.16
N$144: R109.2 R110.1 U$46.15
N$145: R111.1 U$46.10 U$51.22
N$146: R111.2 U$46.11 U$51.23
N$147: C23.1 U$51.24
N$148: U$45.4 U$47.D4(CANRX)
N$149: LED10.A U$47.D7(RX3)
N$150: R114.2 U$48.WDO U$49.1
N$151: U$47.A8 U$49.4
N$152: R118.1 U$47.A0 U$48.WDI
N$153: R115.2 U$50.2
OKHS1: IC10.3 IMD1.P$5 MAIN1.7 R117.1
P2: CANL_JMP.3 GND_JMP.1 X7.2
P3: CANH_JMP.1 GND_JMP.3 X7.3
P5: CANL_JMP.1 X7.5
P7: CANH_JMP.3 X7.7
PI_PUMP_CTRL3: JP6.1 U$34.26
PI_PUMP_CTRL4: JP5.1 U$34.12
PUMP_CTRL3: JP5.2 U$35.1
PUMP_CTRL4: JP6.2 U$36.1
Q3: IC8.3 IC8.5 JP5.3
Q4: IC9.3 IC9.5 JP6.3
READ_FAULT: LED3.A U$8.P$1 X1.5
READ_SWITCH: LED1.A U$10.P$1 X1.6
S5: IC8.1 LED16.A U$34.13 U$37.7
S6: IC8.8 IC8.9 LED15.A U$34.11 U$37.1
S7: IC9.8 IC9.9 LED17.A U$34.15 U$38.1
S8: IC9.1 LED18.A U$34.19 U$38.7
SCK1: U$11.D13 U$14.13 U$40.1
SCK2: U$46.4 U$47.D13 U$52.13
SCK3: JP4.3 U$16.SCK
SCK_33: U$13.P$5 U$14.2
SCK_TLC5940: U$9.25 U$40.4
SCREEN_RS: J1.10 U$27.D2
SCREEN_RX: J1.12 U$27.D1(TX1)
SCREEN_TX: J1.13 U$27.D0(RX1)
SET1: R62.2 SET1.B1 SET1.B2 U$11.A5
SET2: R63.2 SET2.B1 SET2.B2 U$11.A6
SET_P1_ON1: IC8.6 IC8.10
SET_P2_ON1: IC9.6 IC9.10
SHUTDOWN1: D6.A D7.C INTERLOCK1.2 RELAYS1.1 U$41.COIL+
SHUTDOWN2: INTERLOCK1.1 MAIN1.1
SHUTDOWN7_EXT_OUT1: D6.C MAIN1.2
SHUTDOWN_D: LED5.A R6.P$1 U$4.P$1 X1.2
SIGNAL_BRAKE: SW_INT_BR.P$2 X1.4
SIGNAL_CURRENT: SW_INT_CUR.P$2 X1.3
SS_ESP8266: U$11.D5 U$14.10
SS_ESP8266_33: U$13.P$10 U$14.5
SS_TLC5940: U$11.D6 U$40.2
TEMP_SENSE_3: CURRENT4.3 U$52.4
TEMP_SENSE_4: CURRENT3.3 U$52.2
TRIM1: TRIM+1.1 TRIM-1.1 U$42.7TRIM
TSAL+1: MAIN1.3 TSAL_SSR1.3
TSAL_2: TRIM+1.2 TSAL_SSR1.4 U$42.5VOUT+ U$42.6SENSE+
V+: CN1.PWR D3.C F1.P$1
VDD1: JP4.5 R14.1
XLAT: U$9.24 U$11.D9